# Altium PCB WavePCB1.PcbDoc
Units mm, origin at the board's own origin, x right, y up, seen from the top; angles counter-clockwise.
Board outline 104 x 57.55 mm, 4 copper layers (Top Layer, Signal Layer 1, Signal Layer 2, Bottom Layer), stack 2.151 mm thick; 29 components, 29 nets, 143 pads, 0 vias.
Unrouted connection lines stored in the file: 86.
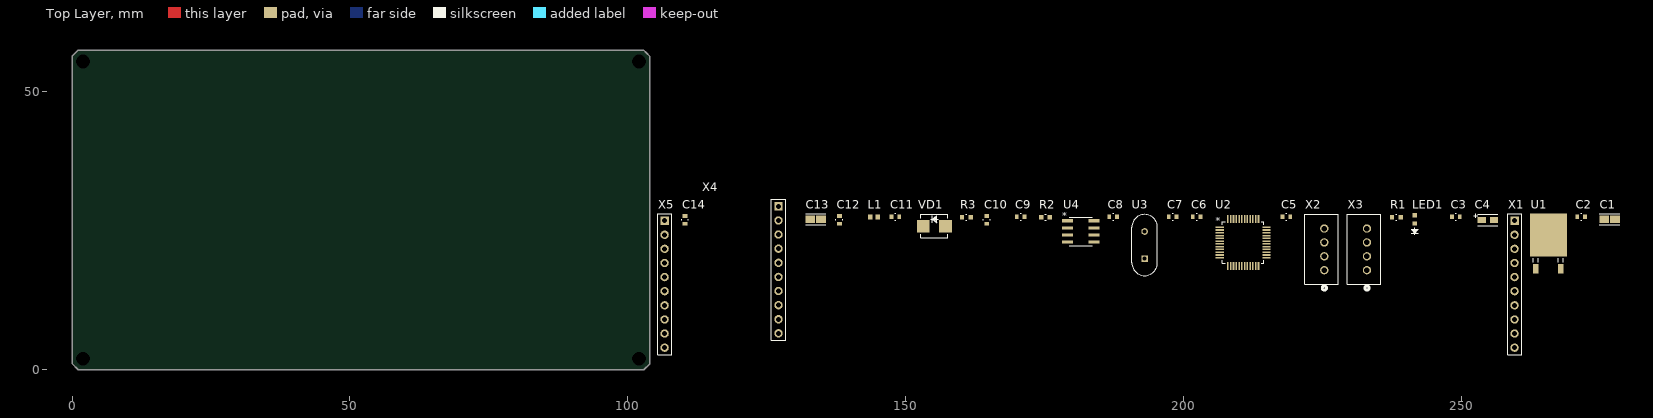
[diagram p0: Top Layer view]
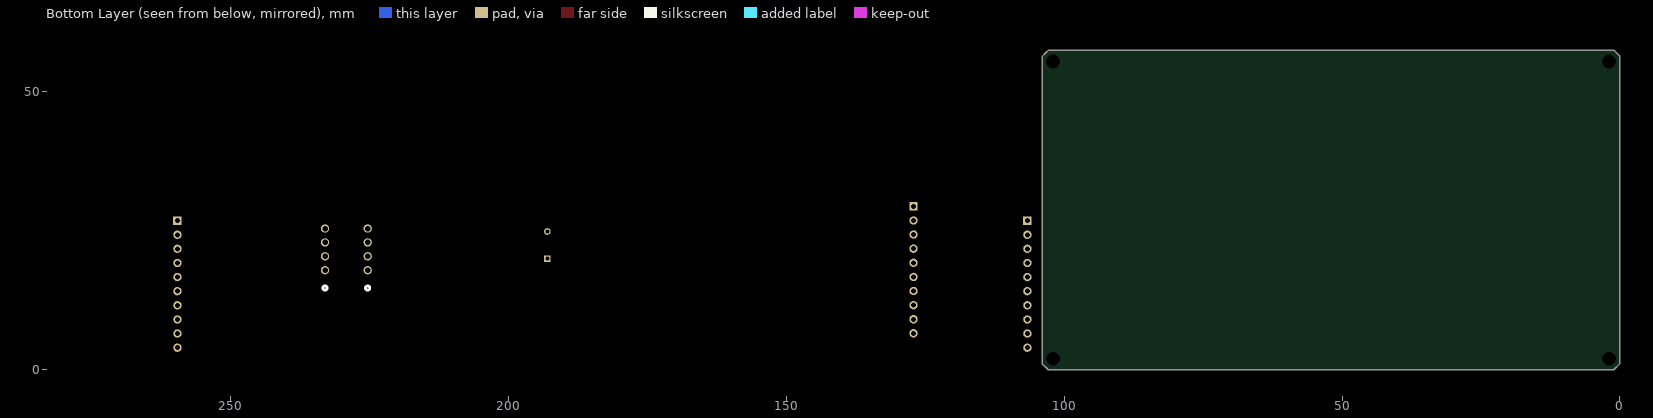
[diagram p1: Bottom Layer view, seen from below]

## Layer stack, top to bottom
Top Solder: solder mask 0.0102, Solder Resist, Dk 3.5
Top Layer: signal copper 0.018
Dielectric 1: core 1.5, FR-4, Dk 4.2
Signal Layer 1: signal copper 0.036
Dielectric 3: prepreg 0.127, Dk 4.2
Signal Layer 2: signal copper 0.036
Dielectric 2: core 0.254, FR4, Dk 4.2
Bottom Layer: signal copper 0.18
Bottom Solder: solder mask 0.0102, Solder Resist, Dk 3.5

## Board outline
0,1.125 0,56.45 1.1,57.55 102.825,57.55 103.325,57.05 104,56.375 104,1.1 102.9,0 1.125,0

## Design rules (kind name [scope] priority, off if disabled: settings)
Clearance [All] p1: gap=0.254 ignorepadtopadclearanceinfootprint=TRUE except(0: Arc-Hole Track-Hole SMDPad-Hole THPad-Hole Via-Hole Fill-Hole Poly-Hole Region-Hole Text-Hole)
ComponentClearance [All] p1: gap=0.01 collisioncheckmode=3 verticalgap=0.1 showdistances=FALSE
HoleSize [All] p1: absolutevalues=TRUE maxlimit=5 minlimit=0.025 maxpercent=80.000 minpercent=20.000
MinimumSolderMaskSliver [All] p1: minsoldermaskwidth=0.19
PolygonConnect [All] p1: connectstyle=Relief reliefconductorwidth=0.254 reliefentries=4 polygonreliefangle="90 Angle" airgapwidth=0.254
RoutingVias [All] p1: holewidth=0.711 width=1.27 viastyle="Through Hole" minholewidth=0.711 minwidth=1.27 maxholewidth=0.711 maxwidth=1.27
SilkToSilkClearance [All] p1: silktosilkclearance=0.17
SilkToSolderMaskClearance [IsPad] p1: minsilkscreentomaskgap=0.17 clearancetoexposedcopper=TRUE
SolderMaskExpansion [All] p1: expansion=0.102
Width [All] p1: maxlimit=10 minlimit=0.2 preferedwidth=0.254
25 further rules are at their usual default settings.

## Components (designator, comment, footprint, x,y, rotation, side; value= is the part's Value field where it differs from the comment)
C1 "293D475X9020A2TE3" CAP_293D_A 276.712,27.102 r0 top value=Value
C2 "0.1uF" 0603-L 271.569,27.534 r0 top value=Value
C3 "0.1uF" 0603-L 249.029,27.534 r0 top value=Value
C4 "T491A476M006AT" CAPT3216N_KEM 254.782,26.975 r0 top value=Value
C5 "0.1uF" 0603-L 218.526,27.534 r0 top value=Value
C6 "20pF" 0603-L 202.373,27.534 r0 top value=Value
C7 "20pF" 0603-L 198.056,27.534 r0 top value=Value
C8 "0.1uF" 0603-L 187.363,27.534 r0 top value=Value
C9 "0.1uF" 0603-L 170.715,27.534 r0 top value=Value
C10 "0.1uF" 0603-L 164.62,27 r90 top value=Value
C11 "0.1uF" 0603-L 148.163,27.534 r0 top value=Value
C12 "0.1uF" 0603-L 138.093,27 r90 top value=Value
C13 "293D475X9020A2TE3" CAP_293D_A 133.827,27.102 r0 top value=Value
C14 "0.1uF" 0603-L 110.297,27 r90 top value=Value
L1 "742792651" IND_BLM18_0603 144.34,27.483 r0 top value=Value
LED1 "LTST-C191TGKT" LED_LTW-C193TS5_ 241.665,27.076 r90 top value=Value
R1 "470" RC0603N 238.337,27.483 r0 top value=Value
R2 "120" RC0603N 175.184,27.483 r0 top value=Value
R3 "10k" RC0603N 160.963,27.483 r0 top value=Value
U1 "LF33CDT-TRY" DPAK_STM 265.664,24.282 r0 top
U2 "STM32F303CBT6" LQFP-48_STM 210.767,22.911 r0 top
U3 "8.000MHZ HC49/4H/30/" HC49-4H 193.026,20.015 r90 top
U4 "MCP2562FD-E/SN" SOIC8-N_MC_MCH 181.534,24.917 r0 top
VD1 "SM6T18CA" SMB_STM 155.185,25.857 r0 top
X1 "PLS6R" PLS-8 259.606,26.848 r0 top value=Value
X2 "B4B-XH-A (LF)(SN)" "CONN_B4B-XH-A (L" 225.367,17.932 r90 top value=Value
X3 "B4B-XH-A (LF)(SN)" "CONN_B4B-XH-A (L" 233.038,17.932 r90 top value=Value
X4 "GY9250" GY9250 127.134,29.422 r0 top
X5 "PLS10" PLS-8 106.64,26.848 r0 top value=Value

## Footprints (in the part's own frame and the unit in brackets; to place one, negate y for a bottom-side part, rotate by r counter-clockwise, add the part's x,y. Pads: shape width x height; smd on the part's side, far side on the other; paste and mask are expansions set on the pad)
0603-L [mil]
  rect 26x34 smd paste+0 mask+0: 1(-27.5,0) 2(27.5,0)
  silkscreen extent -3,-24 3,24, body extent -34,-19 34,19, height 35
CAP_293D_A [mil]
  rect 69x51 smd: 1(-38.5,0) 2(38.5,0)
  silkscreen extent -72,-40 72,40, body extent -67,-36 67,35, height 71
CAPT3216N_KEM [mil]
  rect 58.96x44 smd paste+0 mask+0: 1(-43.52,0) 2(43.52,0)
  silkscreen extent -101,-40 72,45, body extent -67,-35 67,36, height 71
"CONN_B4B-XH-A (L" [mil]
  round 59 hole 39 mask+0: 1(0,0) 2(98.43,0) 3(196.86,0) 4(295.29,0)
  silkscreen extent -141,-97 397,139, body extent -94,-90 394,136, height 276
DPAK_STM [mil]
  rect 37x67 smd paste+0 mask+0: 1(-88.58,-240.5) 2(88.58,-240.5)
  rect 262x304 smd paste+0 mask+0: 3(0,0)
  silkscreen extent -106,-193 106,-165, body extent -130,-227 130,118, height 99
GY9250 [mm]
  rect 1.5x1.5 hole 0.9: 1(0,0)
  round 1.5 hole 0.9: 2(0,-2.54) 3(0,-5.08) 4(0,-7.62) 5(0,-10.16) 6(0,-12.7) 7(0,-15.24) 8(0,-17.78) 9(0,-20.32) 10(0,-22.86)
  silkscreen extent -1.27,-24.13 1.27,1.27, body extent -13.97,-24.76 1.27,1.91, height 9.8
HC49-4H [mil]
  rect 47x47 hole 27 mask+0: 1(0,0)
  round 47 hole 27 mask+0: 2(192,0)
  silkscreen extent -121,-90 313,91, body extent -125,-94 317,94, height 138
IND_BLM18_0603 [mil]
  rect 32x37 smd: 1(-26.5,0) 2(26.5,0)
  body extent -34,-19 34,19, height 37
LED_LTW-C193TS5_ [mil]
  rect 31x31 smd paste+0 mask+0: 1(-29.5,0) 2(29.5,0)
  silkscreen extent -110,-25 -60,25, body extent -31,-16 32,16, height 24
LQFP-48_STM [mil]
  rect 58x11 smd paste+0 mask+0: 1(-166,108.27) 2(-166,88.58) 3(-166,68.9) 4(-166,49.21) 5(-166,29.53) 6(-166,9.84) 7(-166,-9.84) 8(-166,-29.53) 9(-166,-49.21) 10(-166,-68.9) 11(-166,-88.58) 12(-166,-108.27) 25(166,-108.27) 26(166,-88.58) 27(166,-68.9) 28(166,-49.21) 29(166,-29.53) 30(166,-9.84) 31(166,9.84) 32(166,29.53) 33(166,49.21) 34(166,68.9) 35(166,88.58) 36(166,108.27)
  rect 11x58 smd paste+0 mask+0: 13(-108.27,-166) 14(-88.58,-166) 15(-68.9,-166) 16(-49.21,-166) 17(-29.53,-166) 18(-9.84,-166) 19(9.84,-166) 20(29.53,-166) 21(49.21,-166) 22(68.9,-166) 23(88.58,-166) 24(108.27,-166) 37(108.27,166) 38(88.58,166) 39(68.9,166) 40(49.21,166) 41(29.53,166) 42(9.84,166) 43(-9.84,166) 44(-29.53,166) 45(-49.21,166) 46(-68.9,166) 47(-88.58,166) 48(-108.27,166)
  silkscreen extent -147,-147 147,147, body extent -181,-181 181,181, height 63
PLS-8 [mm]
  rect 1.5x1.5 hole 0.9: 1(0,0)
  round 1.5 hole 0.9: 2(0,-2.54) 3(0,-5.08) 4(0,-7.62) 5(0,-10.16) 6(0,-12.7) 7(0,-15.24) 8(0,-17.78) 9(0,-20.32) 10(0,-22.86)
  silkscreen extent -1.27,-24.13 1.27,1.27, body extent -1.14,-24.13 1.4,1.27, height 8.54
RC0603N [mm]
  rect 0.756x0.8 smd paste+0 mask+0: 1(-0.778,0) 2(0.778,0)
  silkscreen extent -0.09,-0.53 0.09,0.53, body extent -0.8,-0.4 0.8,0.4, height 0.71
SMB_STM [mil]
  rect 91x89 smd paste+0 mask+0: 1(-78.5,0) 2(78.5,0)
  silkscreen extent -96,-83 96,83, body extent -110,-78 110,78, height 104
SOIC8-N_MC_MCH [mil]
  rect 78x22 smd paste+0 mask+0: 1(-93,75) 2(-93,25) 3(-93,-25) 4(-93,-75) 5(93,-75) 6(93,-25) 7(93,25) 8(93,75)
  silkscreen extent -82,-102 82,102, body extent -118,-96 118,97, height 69

## Part data
C1 C13: library part 293D475X9020A2TE, "No Description Available", Built_By=EMA_UL_Team, Copyright="Copyright (C) 2018 Accelerated Designs. All rights reserved", Manufacturer_Part_Number=293D475X9020A2TE3, RefDes=RefDes, Type=DEV, Vendor=Vishay
C2 C3 C5 C6 C7 C8 C9 C10 C11 C12 C14: library part 0603ZC224JAT2A, "No Description Available", Built_By=EMA_UL_Team, Copyright="Copyright (C) 2018 Accelerated Designs. All rights reserved", Manufacturer_Part_Number=0603ZC224JAT2A, RefDes=RefDes, Type=DEV, Vendor="AVX Corporation"
C4 L1 LED1 U1 U4 VD1 X1: "No Description Available", RefDes=RefDes, Type=DEV
  C4: Built_By=EMA_UL_Team, Copyright="Copyright (C) 2018 Accelerated Designs. All rights reserved", Manufacturer_Part_Number=T491A476M006AT, SourceLibrary=Kemet_2012-01-01_Caps1_2, Vendor=Kemet
  L1: Built_By=EMA_UL_Team, Copyright="Copyright (C) 2018 Accelerated Designs. All rights reserved", Manufacturer_Part_Number=742792651, Vendor=MURATA
  LED1: Built_By=EMA_Justin, Copyright="Copyright (C) 2016 Accelerated Designs. All rights reserved", Manufacturer_Part_Number=LTST-C191TGKT, SourceLibrary=Lite_On_2018-12-15, Vendor=Lite-On
  U1: Built_By=EMA_UL_Team, Copyright="Copyright (C) 2018 Accelerated Designs. All rights reserved", Manufacturer_Part_Number=LF33CDT-TRY, SourceLibrary=StMicro_2015-03-30, Vendor=STMicroelectronics
  U4: Built_By=EMA_Jessica, Copyright="Copyright (C) 2018 Accelerated Designs. All rights reserved", Manufacturer_Part_Number=MCP2562FD-E/SN, SourceLibrary=Microchip_2019-08-23_14, Vendor=Microchip
  VD1: Built_By=EMA_UL_Team, Copyright="Copyright (C) 2018 Accelerated Designs. All rights reserved", Manufacturer_Part_Number=SM6T18CA, SourceLibrary=StMicro_2011-06-07, Vendor=STMicroelectronics
  X1: Built_By=EMA_UL_Team, Copyright="Copyright (C) 2018 Accelerated Designs. All rights reserved", Manufacturer_Part_Number=PLS6R, Vendor=JST
R1 R2 R3: library part ERA-3AEB101V, "No Description Available", Built_By=EMA_UL_Team, Copyright="Copyright (C) 2018 Accelerated Designs. All rights reserved", RefDes=RefDes, Type=DEV, Vendor=Panasonic
  R1: Manufacturer_Part_Number=470
  R2: Manufacturer_Part_Number=120
  R3: Manufacturer_Part_Number=10k
U2: library part STM32F303CCT6, "No Description Available", Built_By=EMA_UL_Team, Copyright="Copyright (C) 2018 Accelerated Designs. All rights reserved", Link=https://www.promelec.ru/product/241316/, Manufacturer_Part_Number=STM32F303CBT6, RefDes=RefDes, SourceLibrary=StMicro_2015-03-30, Type=DEV, Vendor=STMicroelectronics
U3: library part "8.000MHZ HC49/4H", "No Description Available", Built_By=EMA_UL_Team, Copyright="Copyright (C) 2018 Accelerated Designs. All rights reserved", Link=------------, Manufacturer_Part_Number="8.000MHZ HC49/4H/30/", RefDes=RefDes, SourceLibrary=Euroquartz_2010-01-01, Type=DEV, Vendor=Euroquartz
X2 X3: library part "B4B-XH-A (LF)(SN", "No Description Available", Built_By=EMA_Cory, Copyright="Copyright (C) 2018 Accelerated Designs. All rights reserved", Datasheet=http://www.jst-mfg.com/product/pdf/eng/eXH.pdf, Manufacturer_Part_Number="B4B-XH-A (LF)(SN)", RefDes=RefDes, Type=DEV, Vendor=JST
X5: library part PLS6R, "No Description Available", Built_By=EMA_UL_Team, Copyright="Copyright (C) 2018 Accelerated Designs. All rights reserved", Manufacturer_Part_Number=PLS10, RefDes=RefDes, Type=DEV, Vendor=JST

## Free pads (board coordinates)
  round 0 hole 2.5 unplated: 2(2,55.5) 3(2,2) 4(102,55.5) 5(102,2)

## Nets (pads, with @x,y where several pads share a name; then routed paths per layer and width w, separated by ;. In a path a pad name is that pad's centre, name@x,y a point inside that pad or via, vN(x,y) a via of type N, cw(c..) or ccw(c..) an arc to the next point about the centre after c; other vN are vias at no path point)
+3.3V: C3.2 C4.1 C5.1 C10.2 C11.2 C14.1 L1.2 R3.2 U1.2 U2.1 U2.24 U2.36 U2.48 U4.5 X1.6 X5.8
+5V: C1.1 C2.2 C8.2 U1.1 U4.3 X2.1 X3.1 X4.1 X5.9
CAN_RX: U2.32 U4.4
CAN_TX: U2.33 U4.1
CANH: R2.1 U4.7 VD1.2 X2.2 X3.2
CANL: R2.2 U4.6 VD1.1 X2.3 X3.3
CS: U2.18 X4.9
GND: C1.2 C2.1 C3.1 C4.2 C5.2 C6.1 C7.1 C8.1 C9.1 C10.1 C11.1 C12.1 C13.2 C14.2 U1.3 U2.8 U2.23 U2.35 U2.44 U2.47 U4.2 X1.4 X2.4 X3.4 X4.2 X5.10
INT: U2.19 X4.8
NetC6_2: C6.2 U2.5 U3.2
NetC7_2: C7.2 U2.6 U3.1
NetC12_2: C12.2 C13.1 L1.1 U2.9
NetLED1_2: LED1.2 R1.2
NetR1_1: R1.1 U2.4
NRST: C9.2 R3.1 U2.7 X1.5
PA1: U2.11 X5.1
PA2: U2.12 X5.2
PA3: U2.13 X5.3
PA4: U2.14 X5.4
PB12: U2.25 X5.5
PB13: U2.26 X5.6
PB14: U2.27 X5.7
SPI1_MISO: U2.16 X4.7
SPI1_MOSI: U2.17 X4.4
SPI1_SCK: U2.15 X4.3
STBY: U2.31 U4.8
SWCLK: U2.37 X1.3
SWDIO: U2.34 X1.2
SWO: U2.39 X1.1
pads on no net: LED1.1 U2.2 U2.3 U2.10 U2.20 U2.21 U2.22 U2.28 U2.29 U2.30 U2.38 U2.40 U2.41 U2.42 U2.43 U2.45 U2.46 X1.7 X1.8 X1.9 X1.10 X4.5 X4.6 X4.10

## Silkscreen, mask and mechanical layers (free items; w line width, h text height)
Mechanical 3:
  lines w0.254: 0,1.125 1.125,0 102.9,0 104.05,1.15 104.05,18.606 104.05,38.019 104.05,56.325 103.325,57.05 102.825,57.55 1.1,57.55 0,56.45 0,1.125

## Dimensions
-1.2,0.003 to -1.317,57.529 on Mechanical 5
0.009,-4.907 to 104.044,-2.364 on Mechanical 5

## Panel: embedded boards
"PowerBig.PcbDoc" at 73.156,159.051, 1 rows x 1 columns, spacing 0 x 0, rotation 0

## Text inside footprints (layer, text, board x,y; h text height)
U1: Mechanical 13 "*" at 263.096,20.396 h1.27
U2: Top Overlay "*" at 205.814,26.213 h1.27; Mechanical 13 "*" at 207.223,25.276 h1.27
U4: Top Overlay "*" at 178.232,27.076 h1.27; Mechanical 13 "*" at 179.641,26.022 h1.27